# EAGLE board TRAFFIC LIGHT 2108418 (EAGLE 9.7.0)

Size 252.21 x 113.35 mm. Coordinates in mm from the lower left corner, seen from the top.
Outline: 0,0 252.21,0 252.21,113.35 0,113.35 0,0
Copper layers (1*16): Top 0.035mm / dielectric 1.5mm / Bottom 0.035mm
Design rules "default": minimum track width 6mil, minimum drill 0.35mm, track to track 6mil, track to pad 6mil, pad to pad 6mil, via to via 6mil, smd to smd 6mil, copper to edge 40mil, drill to drill 6mil, minimum pad ring 10mil, minimum via ring 8mil, stop-mask expansion 4mil, vias tented up to drill 0mil, thermal gap 10mil

## Footprints (pad centres in the part's own frame; a part is rotated, then mirrored left to right if it is on the bottom)
LEDRD254W60D565H860B_G = drill 0.981 pad 1.581: 1 -1.27,0; 2 1.27,0
LEDRD254W60D565H860B = drill 0.981 pad 1.581: 1 -1.27,0; 2 1.27,0
LEDRD254W60D565H860B_Y = drill 0.981 pad 1.581: 1 -1.27,0; 2 1.27,0
28015 = drill 1.016 long: 1 -2.54,0; 2 0,0; 3 2.54,0
28027 = drill 1.016 long: 1 -2.54,0; 2 0,0; 3 2.54,0
RESAD1016W63L850D250B = drill 0.83 pad 1.43: 1 -5.08,0; 2 5.08,0
ARDUINO-UNO-R3-SHIELD = drill 1.016 pad 1.88: 3.3V 24.13,-2.54; 5V 24.13,0; A0 24.13,12.7; A1 24.13,15.24; A2 24.13,17.78; A3 24.13,20.32; A4 24.13,22.86; A5 24.13,25.4; AREF -24.13,-13.97; D2 -24.13,20.32; D3 -24.13,17.78; D4 -24.13,15.24; D5 -24.13,12.7; D6 -24.13,10.16; D7 -24.13,7.62; D8 -24.13,3.81; D9 -24.13,1.27; D10 -24.13,-1.27; D11 -24.13,-3.81; D12 -24.13,-6.35; D13 -24.13,-8.89; GND@0 24.13,2.54; GND@1 24.13,5.08; GND@2 -24.13,-11.43; IOREF 24.13,-7.62; NC 24.13,-10.16; RES 24.13,-5.08; RX -24.13,25.4; SCL -24.13,-19.05; SDA -24.13,-16.51; TX -24.13,22.86; VIN 24.13,7.62

## Placement (x,y rotation side)
D1  GREEN  [LEDRD254W60D565H860B_G]  7.91,57.87 270 top
D2  RED  [LEDRD254W60D565H860B]  7.91,46.18 270 top
D3  YELLOW  [LEDRD254W60D565H860B_Y]  7.91,51.26 270 top
PING1  DISTANCE-SENSOR-3PIN  [28015]  226.18,53.43 0 top
PIR1  PIR-SENSOR_28027  [28027]  136.59,107 0 top
R1  180  [RESAD1016W63L850D250B]  12.99,52.53 0 top
R2  180  [RESAD1016W63L850D250B]  12.99,47.45 0 top
R3  180  [RESAD1016W63L850D250B]  12.99,59.14 0 top
UMASTER  ARDUINO-UNO-R3-SHIELD  [ARDUINO-UNO-R3-SHIELD]  133.37,47.88 0 top
USLAVE  ARDUINO-UNO-R3-SHIELD  [ARDUINO-UNO-R3-SHIELD]  42.2,48.72 0 top

## Library data of the parts
D1 = Tinkercad; CATEGORY: Opto-Electronic; SUB-CATEGORY: LED; VALUE: LED_GREEN
D2 = Tinkercad; CATEGORY: Opto-Electronic; SUB-CATEGORY: LED; VALUE: LED_RED
D3 = Tinkercad; CATEGORY: Opto-Electronic; SUB-CATEGORY: LED; VALUE: LED_YELLOW
PING1 PIR1 R1-R3 UMASTER USLAVE = Tinkercad

## Nets
D1_A: D1.1 R3.1
D2_A: D2.1 R2.1
D3_A: D3.1 R1.1
UMASTER_5V: PING1.2 PIR1.2 UMASTER.5V
UMASTER_D7: PIR1.1 UMASTER.D7
UMASTER_D8: PING1.3 UMASTER.D8
UMASTER_RX: UMASTER.RX USLAVE.TX
UMASTER_TX: UMASTER.TX USLAVE.RX
USLAVE_D6: R3.2 USLAVE.D6
USLAVE_D8: R1.2 USLAVE.D8
USLAVE_D10: R2.2 USLAVE.D10
USLAVE_GND: D1.2 D2.2 D3.2 PING1.1 PIR1.3 UMASTER.GND@0 UMASTER.GND@1 UMASTER.GND@2 USLAVE.GND@0 USLAVE.GND@1 USLAVE.GND@2

## Tracks (layer width: path | path; a pad name or v marks a point on that pad's centre or on a via)
D1_A  (1 unrouted)
D2_A  (1 unrouted)
D3_A  (1 unrouted)
UMASTER_5V  (2 unrouted)
UMASTER_D7  (1 unrouted)
UMASTER_D8  (1 unrouted)
UMASTER_RX  (1 unrouted)
UMASTER_TX  (1 unrouted)
USLAVE_D6  (1 unrouted)
USLAVE_D8  (1 unrouted)
USLAVE_D10  (1 unrouted)
USLAVE_GND  (10 unrouted)